# Altium PCB stlink烧录转接板.PcbDoc
Units mil, origin at the board's own origin, x right, y up, seen from the top; angles counter-clockwise.
Board outline 787.4 x 1574.8 mil, 2 copper layers (Top Layer, Bottom Layer); 6 components, 4 nets, 23 pads, 3 vias.
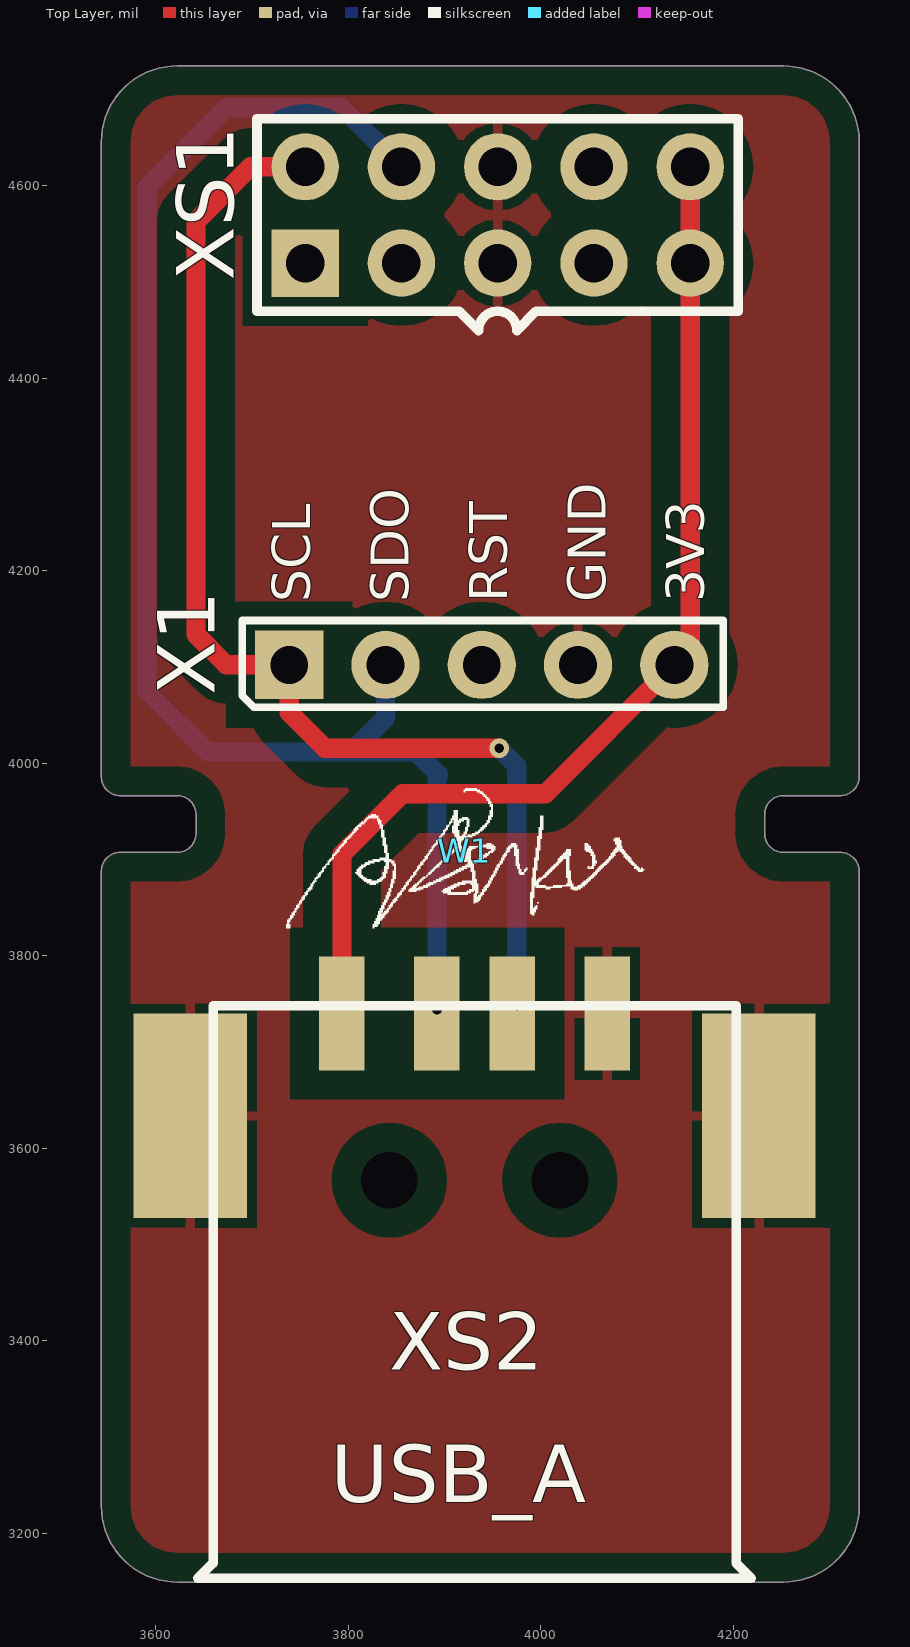
[diagram p0: Top Layer view]
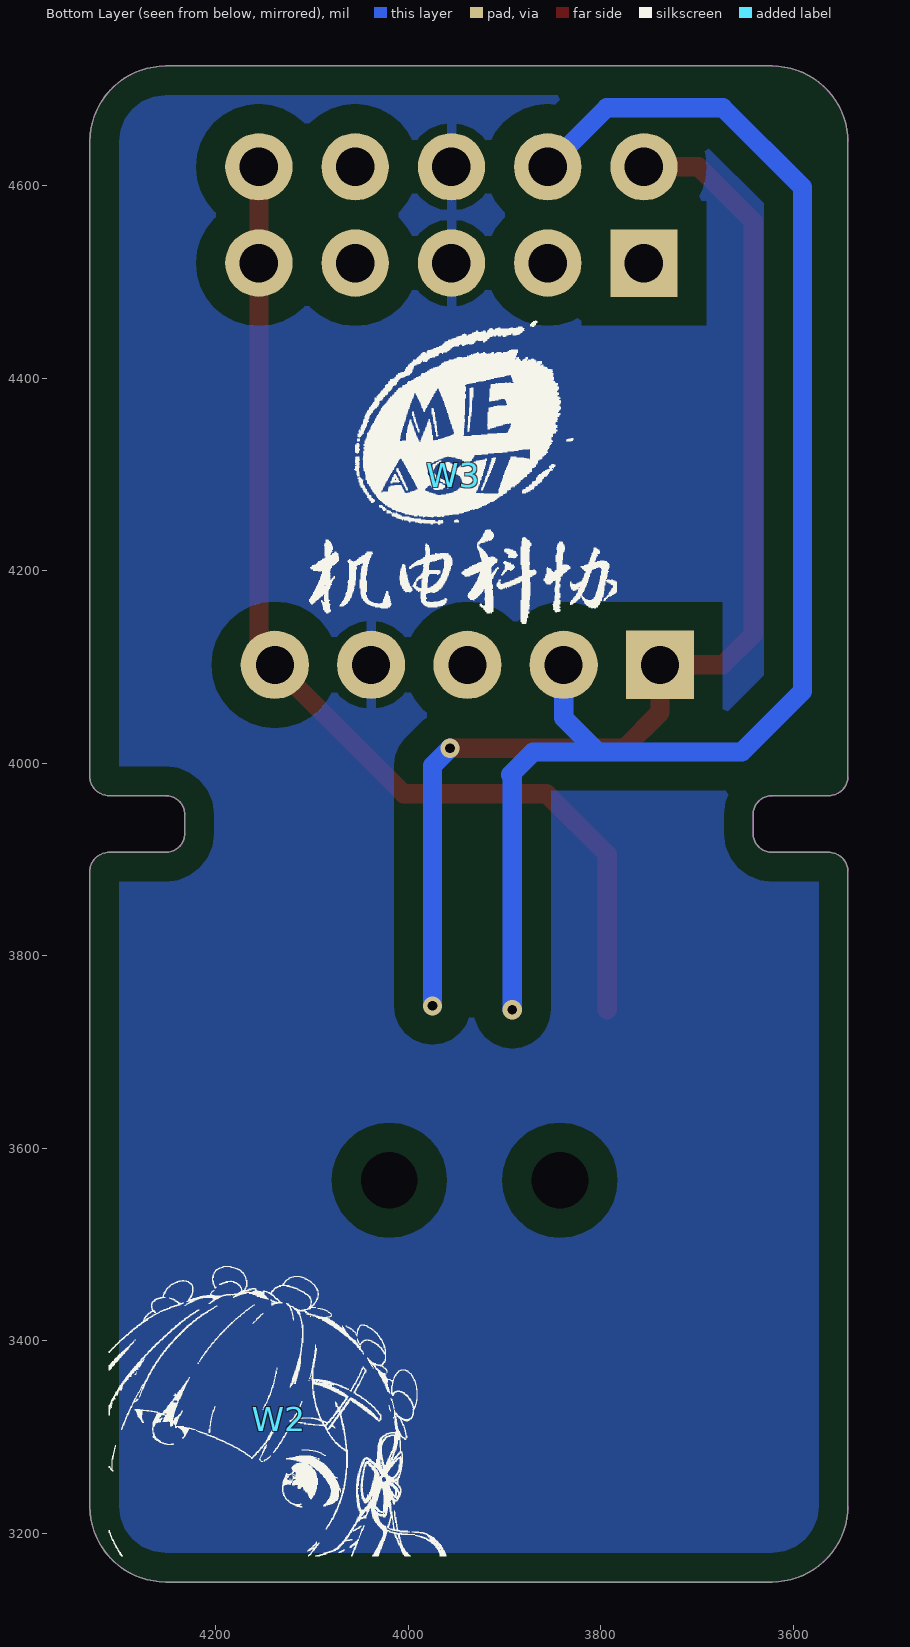
[diagram p1: Bottom Layer view, seen from below]

## Layer stack, top to bottom
Top Solder: solder mask 0.4, Solder Resist, Dk 3.5
Top Layer: signal copper 1.4
Dielectric 1: dielectric 12.6, FR-4, Dk 4.8
Bottom Layer: signal copper 1.4
Bottom Solder: solder mask 0.4, Solder Resist, Dk 3.5

## Board outline
3543.31,3228.35 ccw(c3622.05,3228.35) 3622.05,3149.61 4251.97,3149.61 ccw(c4251.97,3228.35) 4330.71,3228.35 4330.71,3887.8 ccw(c4311.02,3887.8) 4311.02,3907.48 4251.97,3907.48 cw(c4251.97,3927.17) 4232.28,3927.17 4232.28,3946.85 cw(c4251.97,3946.85) 4251.97,3966.54 4311.02,3966.54 ccw(c4311.02,3986.22) 4330.71,3986.22 4330.71,4645.67 ccw(c4251.97,4645.67) 4251.97,4724.41 3622.05,4724.41 ccw(c3622.05,4645.67) 3543.31,4645.67 3543.31,3986.22 ccw(c3562.99,3986.22) 3562.99,3966.54 3622.05,3966.54 cw(c3622.05,3946.85) 3641.73,3946.85 3641.73,3927.17 cw(c3622.05,3927.17) 3622.05,3907.48 3562.99,3907.48 ccw(c3562.99,3887.8) 3543.31,3887.8

## Design rules (kind name [scope] priority, off if disabled: settings)
Clearance Clearance_2 [InNamedPolygon('Top Layer-No Net')] p1: gap=30 ignorepadtopadclearanceinfootprint=FALSE
Clearance Clearance_1 [InNamedPolygon('Bottom Layer-No Net')] p2: gap=30 ignorepadtopadclearanceinfootprint=FALSE
Clearance [All] p3: gap=10 ignorepadtopadclearanceinfootprint=TRUE
PolygonConnect [All] p1: connectstyle=Relief reliefconductorwidth=10 reliefentries=4 polygonreliefangle="90 Angle" airgapwidth=10
RoutingVias [All] p1: holewidth=28 width=50 viastyle="Through Hole" minholewidth=28 minwidth=50 maxholewidth=28 maxwidth=50
SolderMaskExpansion [All] p1: expansion=4
Width [All] p1: maxlimit=50 minlimit=10 preferedwidth=10
30 further rules are at their usual default settings.

## Components (designator, comment, footprint, x,y, rotation, side; value= is the part's Value field where it differs from the comment)
W1 "手写体：王星灿" 手写体：王星灿 3920.76,3909.45 r0 top
W2 "蕾姆" 蕾姆360-340mil 4133.86,3318.9 r180 bottom
W3 "科协徽章" 科协徽章2（310-310） 3952.76,4299.21 r180 bottom
X1 "SWD调试接口" SWD调试接口 3738.58,4102.36 r90 top
XS1 "STlink-STM32F1牛角头" STlink-STM32F1牛角头 3755.12,4519.69 r90 top
XS2 "USB_A" USB_A母口180度贴片 3931.1,3740.16 r0 top

## Footprints (in the part's own frame and the unit in brackets; to place one, negate y for a bottom-side part, rotate by r counter-clockwise, add the part's x,y. Pads: shape width x height; smd on the part's side, far side on the other; paste and mask are expansions set on the pad)
STlink-STM32F1牛角头 [mil]
  rect 70x70 hole 40: 1(0,0)
  round 70 hole 40: 2(100,0) 3(0,-100) 4(100,-100) 5(0,-200) 6(100,-200) 7(0,-300) 8(100,-300) 9(0,-400) 10(100,-400)
  silkscreen extent -70,-450 150,50
SWD调试接口 [mm]
  rect 1.8x1.8 hole 1: 1(0,0)
  round 1.8 hole 1: 2(0,-2.54) 3(0,-5.08) 4(0,-7.62) 5(0,-10.16)
  silkscreen extent -1.12,-11.46 1.17,1.24
USB_A母口180度贴片 [mm]
  rect 1.2x3 smd: 1(-3.5,0) 2(-1,0) 3(1,0) 5(3.5,0)
  rect 3x5.4 smd: 6(7.5,-2.7) 7(-7.5,-2.7)
  round 0 hole 1.5: 21(-2.25,-4.4) 21(2.25,-4.4)
  silkscreen extent -7.3,-14.9 7.3,0.2
手写体：王星灿 [mil]
  silkscreen extent -186,-80 186,64
科协徽章2（310-310） [mil]
  silkscreen extent -150,-154 169,160
蕾姆360-340mil [mil]
  silkscreen extent -177,-143 173,158

## Part data
XS2: library part USB_A母座

## Via types
v1: diameter 20, hole 10, Top Layer to Bottom Layer, 3 vias

## Nets (pads, with @x,y where several pads share a name; then routed paths per layer and width w, separated by ;. In a path a pad name is that pad's centre, name@x,y a point inside that pad or via, vN(x,y) a via of type N, cw(c..) or ccw(c..) an arc to the next point about the centre after c; other vN are vias at no path point)
+5: X1.5 XS1.9 XS1.10 XS2.1 | length 1112.4
  Top Layer w20: XS2.1@3793.31,3744.09 3793.31,3905.51 3856.3,3968.5 4004.72,3968.5 X1.5 4155.12,4118.9 XS1.9 XS1.10
GND: X1.4 XS1.5 XS1.6 XS2.5 XS2.6 XS2.7
SWCLK: X1.1 XS1.2 XS2.3 | length 1234.2
  Top Layer w20: XS1.2 3698.43,4619.69 3641.73,4562.99 3641.73,4133.86 3673.23,4102.36 X1.1 3738.58,4052.76 3775.59,4015.75 v1(3956.69,4015.75)
  Bottom Layer w20: v1(3956.69,4015.75) 3974.86,3997.58 v1(3974.86,3748.03)
SWDIO: X1.2 XS1.4 XS2.2 | length 1536.9
  Bottom Layer w20: X1.2 3838.58,4047.24 3803.15,4011.81 ; XS1.4 3793.74,4681.06 3673.19,4681.06 3590.55,4598.43 3590.55,4074.8 3653.54,4011.81 3803.15,4011.81 ; v1(3892.06,3744.09) 3892.06,3986.54 3893.7,3988.19 3870.08,4011.81 3803.15,4011.81
pads on no net: X1.3 XS1.1 XS1.3 XS1.7 XS1.8 XS2.21

## Polygon pours and split planes (outlines as drawn)
GND on Bottom Layer "Bottom Layer-No Net" (solid, remove dead copper, pour order 0): 3543.31,4724.41 3543.31,3149.61 4330.71,3149.61 4330.71,4724.41
GND on Top Layer "Top Layer-No Net" (solid, remove dead copper, pour order 2): 3543.31,4724.41 3543.31,3149.61 4330.71,3149.61 4330.71,4724.41

## Keep-outs
Keep-Out Layer:
  the board outline again, w0.5

## Text inside footprints (layer, text, board x,y; h text height)
X1: Top Overlay "SCL" at 3760.58,4167.36 h39.37 r90; Top Overlay "SDO" at 3862.83,4167.36 h39.37 r90; Top Overlay "RST" at 3965.08,4167.36 h39.37 r90; Top Overlay "GND" at 4067.33,4167.36 h39.37 r90; Top Overlay "3V3" at 4169.58,4167.36 h39.37 r90